# Altium PCB sion.PcbDoc (part 2 of 2)
Units mm, origin at the board's own origin, x right, y up, seen from the top; angles counter-clockwise.
Board outline 144.6 x 80.67 mm, 2 copper layers (Top Layer, Bottom Layer); 226 components, 203 nets, 882 pads, 135 vias.
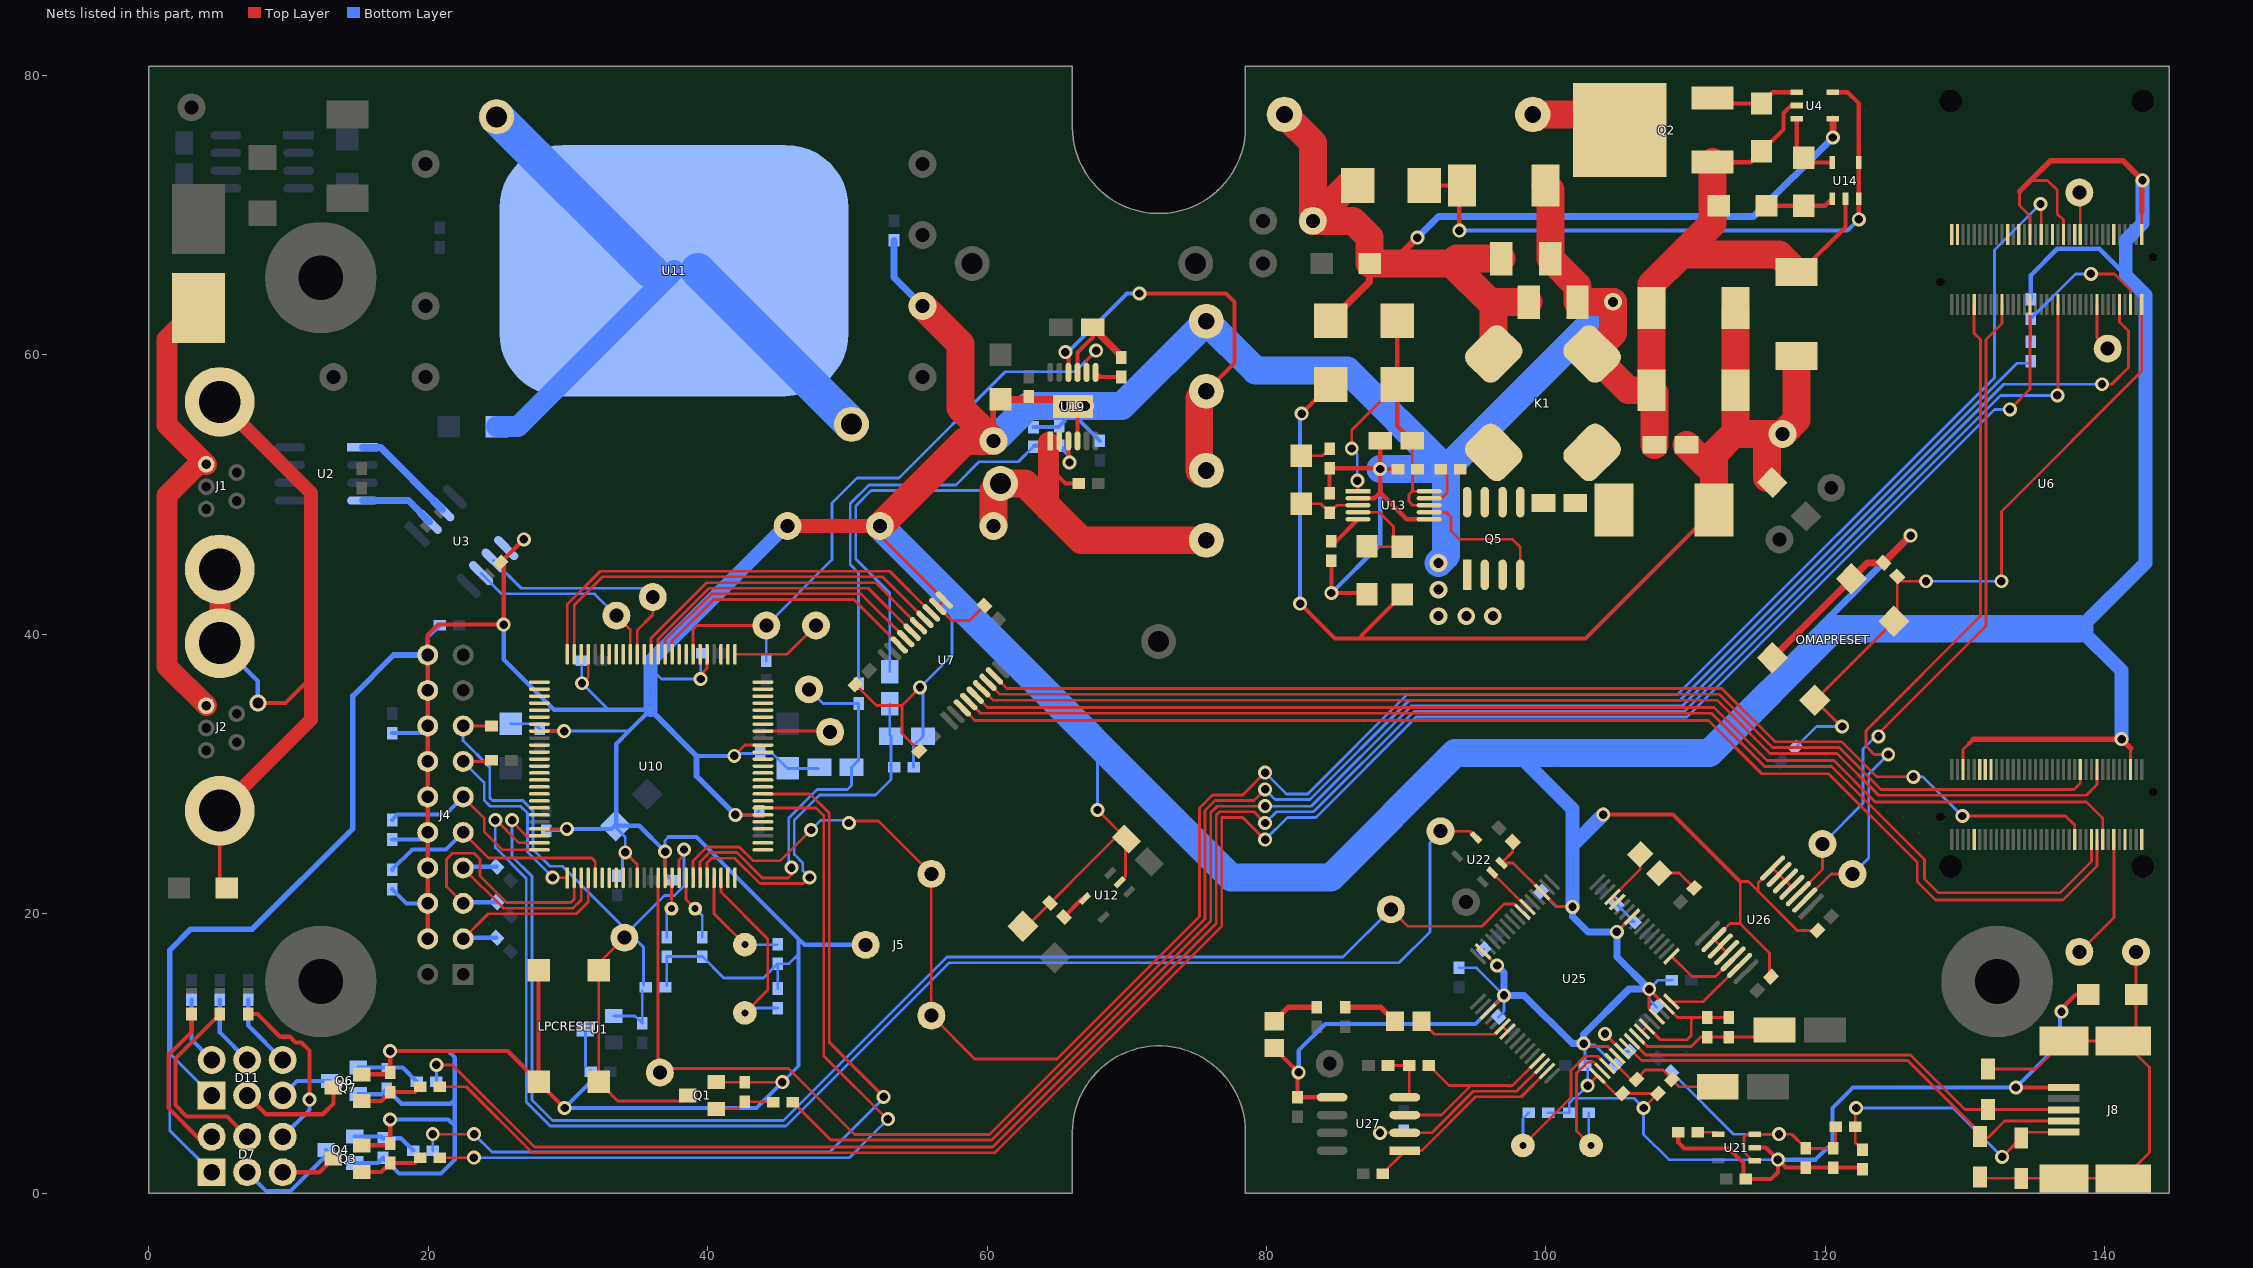
[diagram p2: the nets of this part, all layers, seen from the top]

## Via types
v1: diameter 1, hole 0.6, Top Layer to Bottom Layer, 120 vias
v2: diameter 1.27, hole 0.711, Top Layer to Bottom Layer, 9 vias
v3: diameter 1.2, hole 0.8, Top Layer to Bottom Layer, 6 vias

## Nets (pads, with @x,y where several pads share a name; then routed paths per layer and width w, separated by ;. In a path a pad name is that pad's centre, name@x,y a point inside that pad or via, vN(x,y) a via of type N, cw(c..) or ccw(c..) an arc to the next point about the centre after c; other vN are vias at no path point) (continued)
GND: C1.2 C3.2 C4.2 C6.2 C9.2 C12.1 C13.2 C14.2 C15.2 C16.2 C17.2 C18.2 C19.1 C20.2 C21.2 C22.1 C23.2 C24.1 C25.2 C26.2 C30.2 C32.2 C33.2 C34.2 C35.2 C36.2 C37.2 C38.2 C39.2 C40.1 C42.2 C43.2 C44.2 C45.2 C46.2 C47.2 C56.2 C57.2 C58.2 C59.1 C60.2 C61.2 C62.2 C63.2 C64.2 C65.2 C66.2 C67.2 C68.2 C69.2 C70.2 C71.2 C72.2 C73.2 C74.2 C75.2 C76.1 C77.2 C78.2 C79.2 C80.2 C86.1 C87.2 C88.1 D7.1 D8.K D11.1 GND.0 J4.4 J4.6 J4.8 J4.10 J4.12 J4.14 J4.16 J4.18 J4.20 J5.2 J8.5 K1.4 LPCRESET.3 LPCRESET.4 OMAPRESET.3 OMAPRESET.4 Q1.2 Q2.1 Q3.2 Q4.2 Q5.1 Q5.2 Q5.3 Q6.2 Q7.2 R3.1 R5.1 R16.1 R17.1 R18.1 R19.1 R25.1 R28.2 R34.2 R35.2 R36.1 R41.1 R44.1 R45.2 R46.1 R51.1 R56.1 R57.1 R62.1 R68.1 R69.1 R72.1 U1.3 U3.5 U4.2 U6.J1_50 U6.J1_56 U6.J1_70 U6.J4_3 U6.J4_33 U7.11 U7.12 U10.11 U10.15 U10.31 U10.41 U10.55 U10.72 U10.83 U10.97 U11.5 U12.2 U13.2 U13.6 U14.2 U19.4 U19.13 U21.2 U22.3 U25.1 U25.5 U25.10 U25.11 U25.13 U25.15 U25.25 U25.35 U25.47 U25.51 U26.4 U26.5 U26.6 U26.7 U26.9 U26.10 U26.11 U27.5 | length 1075
  Top Layer w0.2: U10.97@27.952,26.076 v1(29.924,26.076) ; U10.83@27.952,33.076 v1(29.724,33.076) ; v1(31,36.5) 31.452,36.952 U10.72@31.452,38.576 ; v1(34.1,24.4) 34.952,23.548 U10.11@34.952,22.576 ; U10.15@36.952,22.576 v1(36.952,24.448) ; v1(39.5,36.8) 39.5,37.1 39.952,37.552 U10.55@39.952,38.576 ; Q1.2@40.612,7.945 R28.2@42.644,7.945 v1(45.345,7.945) ; v1(41.9,31.3) 42.676,32.076 U10.41@43.952,32.076 ; v1(41.976,27.076) U10.31@43.952,27.076 ; C87.2@50.569,36.412 52.081,34.9 53.9,34.9 ; GND.0@52.324,47.752 52.324,47.061 U7.11@56.93,42.455 U7.12@56.47,41.996 57.466,41 58.749,41 R68.1@59.819,42.069 ; C86.1@55.149,31.652 53.9,32.901 53.9,34.9 ; v1(55.2,36.2) 53.9,34.9 ; C33.2@62.568,19.109 62.855,19.109 69.087,25.341 C32.2@69.985,25.341 v1(67.9,27.427) ; U12.2@69.491,22.243 69.9,22.652 C32.2@69.9,25.256 ; U25.47@95.488,17.312 v1(96.5,16.3) ; U25.51@95.842,12.999 v1(97,14.157) ; C88.1@97.625,25.154 97.625,24.436 U22.3@96.82,23.631 97.654,23.631 U25.35@99.731,21.554 100.785,20.5 v1(101.9,20.5) ; v1(102.7,10.7) 102.9,10.5 104.421,10.5 U25.5@105.105,9.817 ; v1(102.988,7.7) U25.1@103.69,8.402 104.953,7.14 C74.2@105.488,7.14 C73.2@108.028,7.14 v1(106.988,6.1) ; v1(105.079,18.7) U25.25@106.165,19.787 ; U25.10@106.872,11.584 U25.11@107.226,11.938 108.179,10.985 110.085,10.985 110.4,11.3 110.4,12.4 110.573,12.573 ; v1@107.368,14.576 107.368,13.21 U25.13@107.933,12.645 ; v1(107.392,14.6) U25.15@108.64,13.352 109.407,12.585 109.915,12.585 109.927,12.573 110.573,12.573 ; U26.11@112.938,17.229 U26.9@112.019,18.148 113.171,19.3 113.9,19.3 ; C62.2@113.08,12.573 C63.2@111.556,12.573 110.573,12.573 ; C76.1@116,15.598 116,17.2 113.9,19.3 ; U26.4@117.605,21.896 U26.6@116.686,22.815 U26.7@116.226,23.274 115.2,22.248 115.2,21.6 ; C77.2@119.433,18.81 117.99,18.81 115.2,21.6 ; U6.J4_3@129.848,30.318 129.848,31.748 130.3,32.2 ; 133.9,71.7 133.9,70.7 134.648,69.952 U6.J1_50@134.648,68.618 ; 134.693,72.493 135.907,72.493 136.6,71.8 136.6,70.1 137.048,69.652 U6.J1_56@137.048,68.618 ; U6.J4_33@141.848,30.318 141.848,31.852 ; U6.J1_70@142.648,68.618 142.648,70.248 ; 113.9,19.3 113.9,22.3 114.5,22.3 115.2,21.6
  Top Layer w0.3: Q3.2@15.24,3.429 R41.1@17.145,3.429 ; Q7.2@15.24,8.509 17.145,8.509 R72.1@17.272,8.636 v1(17.272,10.172) 25.687,10.172 LPCRESET.4@27.895,7.964 ; R41.1@17.272,3.556 v1(17.272,5.272) ; J4.4@19.956,18.204 J4.6@19.956,20.744 J4.8@19.956,23.284 J4.10@19.956,25.824 J4.12@19.956,28.364 J4.14@19.956,30.904 J4.16@19.956,33.444 J4.18@19.956,35.984 J4.20@19.956,38.524 19.956,39.956 20.7,40.7 v1(25.4,40.7) 25.4,44.915 C3.2@25.175,45.139 v1(26.836,46.8) ; LPCRESET.3@27.895,15.964 LPCRESET.4@27.895,7.964 ; v1(29.759,6.1) LPCRESET.4@27.895,7.964 ; U19.4@66.466,53.848 U19.13@66.466,55.973 ; D8.K@80.548,10.404 v1(82.3,8.652) ; v1@82.212,8.564 C78.2@82.212,6.861 U27.5@84.692,6.861 ; C44.2@84.512,50.113 C45.2@84.512,51.891 v1@88.085,51.891 ; R56.1@84.644,45.26 v1(84.644,42.956) 87.104,42.956 R57.1@87.184,42.876 ; U13.2@86.544,49.74 87.74,49.74 88.138,50.138 ; C6.2@88.138,53.848 v1(88.138,51.838) ; C40.1@89.408,51.816 89.386,51.838 v1(88.138,51.838) ; U13.6@91.644,48.24 90.036,48.24 88.138,50.138 ; v1(104.1,27.1) 109.1,27.1 113.9,22.3 ; C72.2@109.475,4.356 109.475,3.625 109.9,3.2 113.1,3.2 114.132,2.168 C71.2@114.132,1.177 ; Q2.1@111.918,73.796 114.652,73.796 R3.1@115.428,74.572 117,76.144 117,77.3 117.551,77.851 U4.2@117.944,77.851 ; C71.2@114.293,1.016 116.116,1.016 116.6,1.5 v1(116.6,2.4) ; U21.2@115.335,3.265 U21.2@114.932,3.265 115.735,3.265 v1(116.6,2.4) ; C4.2@117.94,65.932 118.232,65.932 121.437,69.137 U14.2@121.437,71.184 ; 117.969,1.831 C61.2@118.588,1.831 ; C59.1@122.652,1.704 122.525,1.831 C61.2@118.588,1.831 ; 130.3,32.2 130.6,32.5 ; v1(133.636,7.564) J8.5@137.068,7.564 ; v1(136.9,13) 136.9,13.2 137.924,14.224 ; 88.138,50.138 v1(88.138,51.838) ; v1(116.6,2.4) 117.169,1.831 C61.2@118.588,1.831
  Top Layer w0.4: GND.0@60.452,53.848 C57.2@60.452,56.312 ; 130.6,32.5 v1(141.2,32.5) 141.848,31.852 ; 133.9,71.7 134.693,72.493 136.1,73.9 141.3,73.9 142.648,72.552 142.648,70.248
  Top Layer w0.5: C57.2@60.96,56.82 65.619,56.82 U19.13@66.141,56.298 ; OMAPRESET.4@116.212,38.319 OMAPRESET.3@121.869,43.976 123.017,45.124 C9.2@124.16,45.124 v1(126.1,47.064)
  Top Layer w1: GND.0@45.72,47.752 GND.0@52.324,47.752
  Top Layer w2: GND.0@52.324,47.752 58.42,53.848 GND.0@60.452,53.848 58.1,56.2 58.1,60.772 U11.5@55.372,63.5 ; C46.2@99.98,72.136 100.31,71.806 C42.2@100.31,66.895 102.258,64.947 C43.2@102.258,63.787 v2@104.787,63.787 ; v2(104.8,63.8) 104.8,61.565 K1.4@103.303,60.068 105.899,57.472 C38.2@107.56,57.472 ; C37.2@107.77,53.564 107.77,57.262 C38.2@107.56,57.472 ; Q2.1@111.918,73.796 111.918,69.418 109.7,67.2 ; C4.2@117.94,65.932 116.672,67.2 109.7,67.2 ; C38.2@107.56,57.472 C39.2@107.56,63.372 107.56,65.06 109.7,67.2
  Bottom Layer w0.2: D7.1@4.5,1.5 1.5,4.5 1.5,10 D11.1@4.5,7 ; C14.2@25.908,33.604 27.609,33.604 C13.2@27.972,33.241 28.137,33.076 v1(29.724,33.076) 34.376,33.076 ; C12.1@28.44,25.952 29.8,25.952 v1(29.924,26.076) ; v1@30.988,36.512 C19.1@30.988,38.1 ; v1(31,36.5) 32.9,34.6 ; C1.2@31.248,9.071 U1.3@31.248,11.715 ; C25.2@33.452,26.416 33.452,26.301 33.452,26.156 34.1,25.508 v1(34.1,24.4) 33.901,24.201 C26.2@33.901,22.396 ; 35.9,37.6 36.7,36.8 v1(39.5,36.8) C24.1@39.5,38.536 ; C47.2@37.076,14.851 C15.2@37.076,16.935 C16.2@39.616,16.935 41.151,15.4 43.987,15.4 C17.2@45.014,16.427 ; 37.2,25.5 36.952,25.252 36.952,22.901 C23.2@37.457,22.396 ; v1(41.9,31.3) 42.08,31.48 C22.1@43.76,31.48 44.644,31.48 C21.2@45.72,30.404 C35.2@47.93,30.404 ; v1(41.976,27.076) 43.407,27.076 C18.2@43.68,27.349 ; C20.2@45.014,14.649 C17.2@45.014,16.427 ; v1(45.345,7.945) 46.52,9.12 ; 46.5,17.1 45.827,16.427 C17.2@45.014,16.427 ; C36.2@54.737,30.48 54.737,32.033 R25.1@55.404,32.7 v1@55.404,35.996 ; v1(55.2,36.2) 57.488,38.488 57.488,42.588 ; v1(67.9,27.427) 67.9,31.7 ; C75.2@93.776,16.129 95.028,16.129 v1(97,14.157) 97,13.016 C70.2@96.598,12.614 ; C69.2@95.52,17.463 95.52,17.28 v1(96.5,16.3) ; C65.2@99.651,21.594 100.745,20.5 v1(101.9,20.5) ; C80.2@100.157,5.753 C79.2@101.673,5.753 101.673,6.473 102,6.8 102.088,6.8 ; v1(102.7,10.7) 102.793,10.607 C66.2@102.793,9.144 ; v1@102.8,10.6 103.496,10.6 R46.1@104.952,9.144 ; C66.2@102.988,8.949 v1(102.988,7.7) 102.088,6.8 ; C68.2@105.039,20.696 C67.2@106.297,19.439 105.817,19.439 v1(105.079,18.7) ; C64.2@107.913,13.332 107.392,13.853 v1(107.392,14.6) 108.032,15.24 R51.1@109.016,15.24 ; v1(116.6,2.4) 108.8,2.4 106.988,4.212 v1(106.988,6.1) 106.288,6.8 102.088,6.8
  Bottom Layer w0.3: Q4.2@14.732,2.159 16.383,2.159 R44.1@16.764,2.54 17.904,1.4 20.9,1.4 21.9,2.4 21.9,4.8 ; Q6.2@14.996,7.083 16.647,7.083 R69.1@17.028,7.464 18.092,6.4 21.6,6.4 21.9,6.7 ; v1(17.272,5.272) 21.428,5.272 21.9,4.8 ; v1(17.272,10.172) 21.428,10.172 21.9,9.7 21.9,6.7 ; R16.1@17.416,21.76 18.432,20.744 J4.6@19.956,20.744 ; R17.1@17.416,25.316 19.448,25.316 J4.10@19.956,25.824 ; R18.1@17.416,32.936 19.448,32.936 J4.16@19.956,33.444 ; J4.20@19.956,38.524 19.956,39.768 R19.1@20.828,40.64 ; v1(25.4,40.7) 25.4,38.2 29,34.6 32.9,34.6 35.9,34.6 34.376,33.076 33.452,32.152 33.452,26.416 33.112,26.076 v1(29.924,26.076) ; 26.211,46.174 v1(26.836,46.8) ; C1.2@31.619,8.7 31.619,7.96 v1(29.759,6.1) 43.5,6.1 v1(45.345,7.945) ; C25.2@33.413,26.301 33.452,26.301 35.099,26.301 v1(36.952,24.448) ; 37.2,25.5 39.2,25.5 46.5,18.2 ; 39.2,31.3 v1(41.9,31.3) ; 46.5,9.14 46.5,17.1 46.5,18.2 ; J5.2@51.308,17.78 46.92,17.78 46.5,18.2 ; R35.2@63.316,54.833 65.108,54.833 65.516,55.241 v2(65.516,56.348) ; v2@65.572,56.348 R36.1@68.072,53.848 ; v1(82.3,8.652) 82.3,10.2 84.2,12.1 94.943,12.1 v1(97,14.157) ; v1(84.644,42.956) 88.138,46.45 v1(88.138,51.838) ; v1(116.6,2.4) 119.3,2.4 120.5,3.6 120.5,6.1 121.964,7.564 v1(133.636,7.564) 136.8,10.728 136.8,12.9 v1(136.9,13) ; R5.1@134.698,63.985 134.698,65.698 136.6,67.6 139.6,67.6 141.5,65.7 ; 21.9,4.8 21.9,6.7
  Bottom Layer w0.4: 1.5,10 1.5,17.4 3,18.9 7.4,18.9 14.6,26.1 14.6,35.6 17.524,38.524 J4.20@19.956,38.524 ; 35.9,34.6 39.2,31.3 39.2,29.852 v1(41.976,27.076)
  Bottom Layer w0.5: C30.2@53.34,68.199 53.34,65.532 U11.5@55.372,63.5 ; v1(96.5,16.3) 97,15.8 v1(97,14.157) 98.443,14.157 101.9,10.7 v1(102.7,10.7) 102.7,11.373 105.927,14.6 v1(107.392,14.6) 105.079,16.914 v1(105.079,18.7) 103,18.7 101.9,19.8 v1(101.9,20.5) ; 118.75,39.714 v1(126.1,47.064)
  Bottom Layer w1: 35.9,34.6 35.9,37.6 35.9,38.104 GND.0@45.634,47.838 ; 98.1,31.3 101.9,27.5 101.9,24.9 ; v1(101.9,20.5) 101.9,24.9 ; v1(104.1,27.1) 101.9,24.9 ; v1(141.2,32.5) 141.2,37.4 138.2,40.4 142.9,45.1 142.9,64.3 141.5,65.7 141.5,68.2 142.7,69.4 v1(142.7,72.5)
  Bottom Layer w2: GND.0@52.324,47.752 57.488,42.588 77.476,22.6 84.6,22.6 93.5,31.5 111.7,31.5 120.6,40.4 138.2,40.4 ; GND.0@60.452,53.848 62.952,56.348 v2(65.516,56.348) 65.572,56.348 v2(67.016,56.348) 69.636,56.348 C58.2@75.692,62.404 79.196,58.9 85.776,58.9 92.838,51.838 ; v1(88.138,51.838) 92.838,51.838 ; v2(92.3,45.1) 92.838,45.638 92.838,51.838 ; v2(104.8,63.8) 92.838,51.838
  other v2: 92.3,41.3 94.3,41.3 96.2,41.3 92.3,43.2
L\P\C\R\E\S\E\T\: R6.2 U6.J1_5 | length 129
  Top Layer w0.2: R6.2@46.089,6.516 48.805,3.8 60.334,3.8 76,19.466 76,26.9 76,27.231 76.469,27.7 v1(79.9,27.7) ; v1(139.8,57.9) 140.5,57.9 141.7,59.1 141.7,61.716 141.048,62.368 U6.J1_5@141.048,63.618
  Bottom Layer w0.2: v1(79.9,27.7) 83.2,27.7 90.384,34.884 109.753,34.884 132.769,57.9 v1(139.8,57.9)
LEDRED: R61.1 U6.J1_16 | length 153.7
  Top Layer w0.2: v1(20.584,9.184) 21.716,9.184 27.6,3.3 60.4,3.3 76.4,19.3 76.4,27.066 76.634,27.3 79.1,27.3 v1(79.9,26.5) ; U6.J1_16@136.6,63.57 U6.J1_16@136.648,63.618 v1@136.648,57.148
  Bottom Layer w0.2: R61.1@20.584,7.972 v1(20.584,9.184) ; v1(79.9,26.5) 80.7,27.3 83.366,27.3 90.55,34.484 109.919,34.484 132.534,57.1 v1(136.6,57.1)
LEDYLW: R71.1 U6.J1_21 | length 150.4
  Top Layer w0.2: R71.1@20.828,7.62 22.714,7.62 27.434,2.9 60.566,2.9 76.8,19.134 76.8,26.9 78.3,26.9 v1(79.9,25.3) ; v1(133.2,56.1) 134.648,57.548 U6.J1_21@134.648,63.618
  Bottom Layer w0.2: v1(79.9,25.3) 81.5,26.9 83.531,26.9 90.716,34.084 110.084,34.084 132.1,56.1 v1(133.2,56.1)
LPC_CLK: U7.16 U10.62 | length 22.1
  Top Layer w0.2: U10.62@36.452,38.576 36.452,39.651 40.101,43.3 51.489,43.3 U7.16@54.632,40.157
LPC_CS: U7.15 U10.63 | length 23.2
  Top Layer w0.2: U10.63@35.952,38.576 35.952,39.717 39.935,43.7 52.008,43.7 U7.15@55.091,40.617
LPC_MISO: U7.17 U10.61 | length 20.9
  Top Layer w0.2: U10.61@36.952,38.576 36.952,39.585 40.266,42.9 42.334,42.9 50.97,42.9 U7.17@54.172,39.698
LPC_MOSI: U7.18 U10.60 | length 19.8
  Top Layer w0.2: U10.60@37.452,38.576 37.452,39.52 40.432,42.5 50.45,42.5 U7.18@53.712,39.238
LPC_RX: U7.14 U10.74 | length 30.7
  Top Layer w0.2: U10.74@30.452,38.576 30.452,42.1 32.472,44.12 52.507,44.12 U7.14@55.551,41.077
LPC_TX: U7.13 U10.75 | length 31.9
  Top Layer w0.2: U10.75@29.952,38.576 29.952,42.166 32.306,44.52 53.027,44.52 U7.13@56.01,41.536
NetC4_1: 3V3_ISNS.0 C4.1 C37.1 C38.1 C39.1 D1.K D6.A R27.2 R30.2 | length 84.2
  Top Layer w0.3: v1(82.4,42.2) 84.9,39.7 102.829,39.7 D1.K@112.021,48.892 ; v1(82.511,55.8) D6.A@84.583,57.872 ; 86.8,39.923 R30.2@89.724,42.847
  Top Layer w2: C37.1@110.056,53.564 111.72,51.9 ; D1.K@112.021,48.892 112.021,52.921 113.444,54.344 ; C39.1@113.56,63.372 C38.1@113.56,57.472 113.56,54.46 113.444,54.344 ; R27.2@115.824,51.181 115.824,53.244 ; C4.1@117.94,59.932 117.94,55.36 3V3_ISNS.0@116.924,54.344 113.444,54.344
  Bottom Layer w0.3: v1(82.4,42.2) 82.4,55.689 v1(82.511,55.8)
NetC6_1: C6.1 C40.2 D2.K D6.K U13.1 U13.8 U13.10 | length 25.4
  Top Layer w0.2: v1(86.1,53.3) 86.1,54.619 D6.K@89.353,57.872 ; v1(86.5,51) 86.544,50.956 U13.1@86.544,50.24 ; C6.1@90.424,53.848 90.424,52.197 90.44,52.181 90.44,50.24 ; U13.8@91.644,49.24 90.46,49.24 90.2,49.5 90.2,50 90.44,50.24 ; U13.10@91.644,50.24 90.44,50.24
  Top Layer w0.3: D2.K@89.353,62.444 D6.K@89.353,57.872 89.353,54.919 C6.1@90.424,53.848
  Bottom Layer w0.2: v1(86.1,53.3) 86.5,52.9 v1(86.5,51)
NetC34_1: C34.1 U12.4 | length 2.2
  Top Layer w0.3: C34.1@65.668,19.774 C34.1@65.495,19.774 66.811,21.089 U12.4@66.983,21.089
NetC35_1: C35.1 LTC_ISENSE.0 R22.1 U10.20 | length 28.5
  Top Layer w0.2: U10.20@39.452,22.576 39.452,23.718 40.11,24.376 42.09,24.376 43.906,22.56 45.76,22.56 46,22.8 v1(46,23.3)
  Bottom Layer w0.2: v1(46,23.3) 45.8,23.5 45.8,26.866 47.834,28.9 50,28.9 50.292,29.192 C35.1@50.292,30.48 50.8,30.988 R22.1@50.8,35.052 48.26,35.052 LTC_ISENSE.0@47.244,36.068
NetC36_1: C36.1 R24.2 R25.2 U10.21 | length 27.5
  Top Layer w0.2: U10.21@39.952,22.576 39.952,23.652 40.276,23.976 41.313,23.976 41.924,23.976 43.74,22.16 46.86,22.16 v1(47.3,22.6)
  Bottom Layer w0.2: v1(47.3,22.6) 46.8,23.1 46.8,23.631 46.2,24.231 46.2,26.7 48,28.5 52,28.5 53.118,29.618 R25.2@53.118,32.7 ; R25.2@53.028,32.79 R24.2@53.028,35.034
NetC41_1: C41.1 K1.2 Q5.5 Q5.6 Q5.7 Q5.8 R29.2
NetC41_2: C41.2 D1.A K1.3
NetC44_1: C44.1 R31.2 U13.3 | length 4.5
  Top Layer w0.2: R31.2@82.48,49.351 83.877,49.351 C44.1@84.512,48.716 85.036,49.24 U13.3@86.544,49.24
NetC45_1: C45.1 R31.1 | length 2.2
  Top Layer w0.2: R31.1@82.48,52.78 84.004,52.78 C45.1@84.512,53.288
NetC46_1: C46.1 D9.K U4.5 U14.3 U14.4 | length 45.4
  Top Layer w0.3: D9.K@91.285,72.136 C46.1@93.98,72.136 93.8,71.956 v1(93.8,68.9) ; U4.5@120.534,78.804 121.596,78.804 122.394,78.006 U14.4@122.394,73.774 U14.3@122.394,71.184 v1(122.394,69.706)
  Bottom Layer w0.3: v1(93.8,68.9) 121.588,68.9 v1(122.394,69.706)
NetC59_2: C59.2 J8.1 L1.1 U20.1 | length 20.3
  Top Layer w0.2: v1(122.2,6.1) 122.144,6.044 L1.1@122.144,4.752 122.144,3.609 C59.2@122.652,3.101 ; v1(132.656,2.6) U20.1@134.02,3.964 134.42,4.364 J8.1@137.068,4.364
  Bottom Layer w0.2: v1(122.2,6.1) 129.156,6.1 v1(132.656,2.6)
NetC62_1: C62.1 C63.1 L2.2 U25.9 | length 9.9
  Top Layer w0.2: U25.9@106.519,11.231 107.25,10.5 110.4,10.5 111.076,11.176 C63.1@111.556,11.176 C62.1@113.08,11.176 L2.2@115.852,11.176
NetC72_1: C72.1 U21.4 | length 1.5
  Top Layer w0.2: C72.1@110.872,4.356 112.208,4.356 U21.4@112.342,4.222
NetC73_1: C73.1 C74.1 L3.2 U25.4 | length 8.9
  Top Layer w0.2: U25.4@104.751,9.463 106.086,8.128 C74.1@106.476,8.128 107.111,8.828 108.381,8.828 C73.1@109.016,8.128 109.524,7.62 L3.2@112.296,7.62
NetC79_1: C79.1 U25.2 Y4.2 | length 10.5
  Top Layer w0.2: Y4.2@103.229,3.42 102.188,4.46 102.188,8.588 103,9.4 103.4,9.4 U25.2@104.044,8.756
  Bottom Layer w0.2: C79.1@103.07,5.753 103.07,3.578 Y4.2@103.229,3.42
NetC80_1: C80.1 U25.3 Y4.1 | length 12.6
  Top Layer w0.2: Y4.1@98.349,3.42 101.788,6.86 101.788,8.788 102.8,9.8 103.707,9.8 U25.3@104.398,9.109
  Bottom Layer w0.2: Y4.1@98.349,3.42 98.349,5.342 C80.1@98.76,5.753
NetD7_2: D7.2 Q4.3 | length 7.7
  Bottom Layer w0.3: D7.2@7.04,1.5 8.39,0.15 10.139,0.15 12.7,2.711 Q4.3@12.7,3.099
NetD7_3: D7.3 Q3.3 | length 4
  Top Layer w0.3: D7.3@9.58,1.5 12.219,1.5 Q3.3@13.208,2.489
NetD7_4: D7.4 R38.2 | length 12.4
  Top Layer w0.3: R38.2@7.112,12.827 7.773,12.827 9.4,11.2 10.098,11.2 10.503,10.795 10.905,10.795 11.5,10.2 v1(11.5,6.7)
  Bottom Layer w0.3: D7.4@9.58,4.04 11.5,5.96 v1(11.5,6.7)
NetD7_5: D7.5 R40.2 | length 13.9
  Top Layer w0.3: R40.2@5.08,12.827 1.9,9.647 1.9,6.307 2.707,5.5 5.58,5.5 D7.5@7.04,4.04
NetD7_6: D7.6 R42.2 | length 11.5
  Top Layer w0.3: R42.2@3.048,12.827 3.048,11.548 1.4,9.9 1.4,6.1 3.6,3.9 4.36,3.9 D7.6@4.5,4.04
NetD8_A: D8.A R53.1 | length 3.5
  Top Layer w0.4: D8.A@80.548,12.304 81.564,13.32 R53.1@83.596,13.32
NetD10_A: D10.A R55.1 | length 4
  Top Layer w0.4: R55.1@85.628,13.32 88.168,13.32 D10.A@89.184,12.304
NetD11_2: D11.2 Q7.3 | length 8.2
  Top Layer w0.3: D11.2@7.04,7 8.39,5.65 12.45,5.65 13.208,6.408 Q7.3@13.208,7.569
NetD11_3: D11.3 Q6.3 | length 3.8
  Bottom Layer w0.3: D11.3@9.58,7 10.603,8.023 Q6.3@12.964,8.023
NetD11_4: D11.4 R60.2 | length 5.3
  Bottom Layer w0.3: R60.2@7.112,13.843 7.112,12.008 D11.4@9.58,9.54
NetD11_5: D11.5 R64.2 | length 5.1
  Bottom Layer w0.3: R64.2@5.08,13.843 5.08,11.5 D11.5@7.04,9.54
NetD11_6: D11.6 R70.2 | length 4.9
  Bottom Layer w0.3: R70.2@3.048,13.843 3.048,10.992 D11.6@4.5,9.54
NetD13_A: D13.A R54.1 | length 3
  Top Layer w0.2: D13.A@108.099,22.915 109.536,22.915 R54.1@110.613,21.837
NetF1_1: F1.1 J1.2 J2.2 | length 33.2
  Top Layer w1.5: F1.1@3.556,63.363 1.3,61.107 1.3,54.98 J1.2@4.112,52.168 3.52,52.168 1.3,49.948 1.3,37.708 J2.2@4.112,34.896
NetJ1_0: J1.0 J2.0 R7.1 | length 55.6
  Top Layer w0.254: J2.0@5.077,27.378 5.077,22.355 R7.1@5.588,21.844
  Top Layer w0.3: v3(7.819,35.081) 9.781,35.081 11.6,36.9
  Top Layer w1: J2.0@5.077,27.378 11.6,33.901 11.6,36.9 11.6,50.115 J1.0@5.077,56.639
  Top Layer w1.5: J2.0@5.077,39.367 J1.0@5.077,44.65
  Bottom Layer w0.3: J2.0@5.077,39.367 7.8,36.643 7.8,35.1 v3(7.819,35.081)
NetJ8_2: J8.2@137.068,5.164 U24.0 U25.7 | length 34.2
  Top Layer w0.2: U25.7@105.812,10.524 106.835,9.5 125.9,9.5 U24.0@131.3,4.1 ; U24.0@131.47,3.964 131.628,3.964 132.828,5.164 J8.2@137.068,5.164
NetJ8_3: J8.3 U23.0 U25.8 | length 32.8
  Top Layer w0.2: U25.8@106.165,10.877 107.143,9.9 117.2,9.9 ; 117.3,9.9 126.1,9.9 130.004,5.996 U23.0@131.628,5.996 137.036,5.996 J8.3@137.068,5.964
NetQ1_1: Q1.1 R6.1 R28.1 | length 4.3
  Top Layer w0.2: Q1.1@40.612,6.04 42.136,6.04 R28.1@42.644,6.548 R6.1@44.66,6.548
NetQ2_2: Q2.2 R1.1 | length 5.1
  Top Layer w2: R1.1@99.06,77.216 Q2.2@104.148,77.216
NetQ2_3: Q2.3 R3.2 U4.1 | length 6.5
  Top Layer w0.3: Q2.3@111.918,78.396 112.313,78.001 R3.2@115.428,78.001 116.231,78.804 U4.1@117.944,78.804
NetQ3_1: Q3.1 R39.2 R41.2 | length 4.6
  Top Layer w0.3: Q3.1@15.24,1.524 16.637,1.524 R41.2@17.272,2.159 19.05,2.159 R39.2@19.431,2.54
NetQ4_1: Q4.1 R43.2 R44.2 | length 4.4
  Bottom Layer w0.3: Q4.1@14.732,4.064 R44.2@16.637,4.064 ; R44.2@16.764,3.937 18.034,3.937 R43.2@18.923,3.048
NetQ5_4: Q5.4 U13.7 | length 10.1
  Top Layer w0.2: U13.7@91.644,48.74 92.86,48.74 93.2,48.4 93.2,47.4 93.8,46.8 97.6,46.8 98.165,46.235 Q5.4@98.165,44.26
NetQ6_1: Q6.1 R61.2 R69.2 | length 4.6
  Bottom Layer w0.3: Q6.1@14.996,8.988 18.171,8.988 R61.2@19.187,7.972
NetQ7_1: Q7.1 R71.2 R72.2 | length 4.6
  Top Layer w0.3: Q7.1@15.24,6.604 16.637,6.604 R72.2@17.272,7.239 19.05,7.239 R71.2@19.431,7.62
NetR4_2: R4.2 RSTOUT.0 U10.14 | length 142.1
  Top Layer w0.2: RSTOUT.0@36.452,8.636 U10.14@36.452,22.576 ; RSTOUT.0@36.576,8.636 36.857,8.917 45.783,8.917 50.5,4.2 60.169,4.2 75.6,19.631 75.6,26.9 75.6,27.397 76.303,28.1 79.1,28.1 v1(79.9,28.9)
  Bottom Layer w0.2: v1(79.9,28.9) 80.617,28.183 83.117,28.183 90.219,35.284 109.587,35.284 133.703,59.4 R4.2@134.648,59.4
NetR20_1: R20.1 U11.8 | length 17.3
  Bottom Layer w1.5: R20.1@24.892,54.864 26.416,54.864 U11.8@37.592,66.04
NetR29_1: R29.1 U13.9 | length 3.3
  Top Layer w0.2: U13.9@91.644,49.74 92.53,49.74 92.94,50.15 92.94,51.332 R29.1@92.456,51.816
NetR30_1: R30.1 R57.2 U13.4 | length 7
  Top Layer w0.2: U13.4@86.544,48.74 88.06,48.74 89.084,47.716 R30.1@89.084,46.205 ; R57.2@87.184,46.305 87.213,46.276 R30.1@89.724,46.276
NetR33_1: R33.1 R37.2 U19.9 | length 6.7
  Top Layer w0.3: U19.9@66.466,58.748 66.466,60.168 67.448,61.15 67.45,61.15 67.564,61.264 R33.1@67.564,61.976
  Top Layer w0.5: R33.1@67.564,61.976 69.596,59.944 R37.2@69.596,59.817
NetR37_1: R37.1 U19.7 | length 2
  Top Layer w0.3: U19.7@67.766,58.748 68.094,58.42 R37.1@69.596,58.42
NetR39_1: R39.1 U10.32 | length 61.4
  Top Layer w0.2: R39.1@20.828,2.54 v1(23.26,2.54) ; U10.32@43.952,27.576 47.758,27.576 48.3,27.034 48.3,9.834 v1@52.867,5.267
  Bottom Layer w0.2: v1(23.26,2.54) 28.76,2.54 50.14,2.54 51.8,4.2 v1(52.9,5.3)
NetR43_1: R43.1 U10.34 | length 62.9
  Top Layer w0.2: v1(20.32,4.22) v1(23.28,4.22) ; U10.34@43.952,28.576 47.324,28.576 48.7,27.2 48.7,10.8 v1(52.6,6.9)
  Bottom Layer w0.2: R43.1@20.32,3.048 v1(20.32,4.22) ; v1(23.28,4.22) 24.56,2.94 28.926,2.94 48.74,2.94 52.6,6.8 v1(52.6,6.9)
NetR46_2: R46.2 U25.6 | length 4
  Top Layer w0.2: v1(104.228,11.4) U25.6@105.458,10.17
  Bottom Layer w0.2: v1(104.228,11.4) 105.496,10.132 R46.2@105.94,10.132
NetR48_1: R48.1 R52.1 U27.4 | length 3.5
  Top Layer w0.2: R48.1@88.696,9.144 R52.1@90.22,9.144 90.22,7.189
NetR49_1: R49.1 U25.63 U27.1 | length 14.9
  Top Layer w0.2: R49.1@88.308,1.4 89.892,2.984 U27.1@89.892,3.051 91.117,3.051 94.966,6.9 98.228,6.9 U25.63@100.084,8.756
NetR50_1: R50.1 U25.62 U27.2 | length 15.2
  Top Layer w0.2: v1(88.121,4.321) U27.2@89.892,4.321 91.821,4.321 94.8,7.3 97.9,7.3 99.709,9.109 U25.62@99.731,9.109
  Bottom Layer w0.2: v1(88.121,4.321) R50.1@89.697,4.321
NetR52_2: R52.2 U25.61 U27.3 | length 14.7
  Top Layer w0.2: U27.3@89.892,5.591 92.525,5.591 94.634,7.7 ; R52.2@91.617,9.144 93.061,7.7 94.634,7.7 ; U25.61@99.377,9.463 97.614,7.7 94.634,7.7
NetR56_2: R56.2 U13.5 | length 2.2
  Top Layer w0.3: R56.2@84.961,46.657 U13.5@86.544,48.24
NetR59_1: R59.1 R62.2 U14.1 | length 4.9
  Top Layer w0.3: R62.2@115.785,70.676 R59.1@118.452,70.676 119.976,70.676 U14.1@120.484,71.184
NetR59_2: R59.2 U4.3 U14.5 | length 5.2
  Top Layer w0.3: U4.3@117.944,76.894 117.944,74.613 118.783,73.774 U14.5@120.484,73.774
NetTP3_0: CAN_RX.0 U3.7 U10.66 | length 14.1
  Top Layer w0.2: CAN_RX.0@33.464,41.34 34.452,40.352 U10.66@34.452,38.576
  Bottom Layer w0.2: U3.7@23.781,44.378 25.259,42.9 31.904,42.9 CAN_RX.0@33.464,41.34
NetTP4_0: CAN_TX.0 U3.6 U10.65 | length 17
  Top Layer w0.2: U10.65@34.952,38.576 34.952,40.288 36.068,41.404 CAN_TX.0@36.068,42.672
  Bottom Layer w0.2: U3.6@24.679,45.276 26.655,43.3 35.44,43.3 CAN_TX.0@36.068,42.672
NetTP16_0: SYS_EN.0 U6.J1_59 | length 2.9
  Top Layer w0.2: U6.J1_59@138.248,68.618 SYS_EN.0@138.248,71.556
NetTP17_0: GPIO0_WKUP.0 U6.J1_9 | length 3.5
  Top Layer w0.2: U6.J1_9@139.448,63.618 139.448,61.212 GPIO0_WKUP.0@140.208,60.452
NetTP19_0: U10.99 U22.4 UART1_TX.0 | length 106.4
  Top Layer w0.2: v1(24.8,26.7) 24.869,26.7 26.493,25.076 U10.99@27.952,25.076 ; UART1_TX.0@92.456,25.908 94.544,25.908 U22.4@94.989,25.463
  Bottom Layer w0.2: v1(24.8,26.7) 24.8,24.734 27.017,22.517 27.017,6.517 28.734,4.8 45.6,4.8 57.3,16.5 89.5,16.5 91.7,18.7 91.7,25.1 UART1_TX.0@92.456,25.856 ; UART1_TX.0@92.4,25.8 UART1_TX.0@92.456,25.856 ; UART1_TX.0@92.456,25.908 UART1_TX.0@92.456,25.856
NetTP20_0: U6.J1_26 U26.3 UART_RX.0 | length 48.3
  Top Layer w0.2: U26.3@118.064,21.436 119.788,23.159 UART_RX.0@119.788,25.001 ; v1(123.8,32.7) 123.8,32.9 131.5,40.6 131.5,61.1 132.648,62.248 U6.J1_26@132.648,63.618
  Bottom Layer w0.2: UART_RX.0@119.788,25.001 122.7,27.913 122.7,31.8 123.6,32.7 v1(123.8,32.7)
NetTP22_0: U6.J1_31 U26.2 UART_TX.0 | length 50.9
  Top Layer w0.2: U26.2@118.524,20.976 120.394,22.846 UART_TX.0@121.943,22.846 ; v1(124.5,31.4) 123.5,31.4 122.9,32 122.9,33.1 131.1,41.3 131.1,61.1 130.648,61.552 U6.J1_31@130.648,63.618
  Bottom Layer w0.2: UART_TX.0@121.943,22.846 123.1,24.003 123.1,30 v1(124.5,31.4)
NetTP28_0: CLKOUT.0 U10.43 | length 4.8
  Top Layer w0.2: U10.43@43.952,33.076 CLKOUT.0@48.712,33.076
NetTP29_0: SPI1_NIRQ.0@47.752,40.64 U10.51 | length 6.7
  Top Layer w0.2: U10.51@41.952,38.576 45.688,38.576 SPI1_NIRQ.0@47.752,40.64
NetTP30_0: SPI1_NIRQ.0@138.176,17.272 U6.J4_41 | length 9.1
  Top Layer w0.2: SPI1_NIRQ.0@138.176,17.272 140.648,19.744 U6.J4_41@140.648,25.318
NetU2_1: U2.1 U3.3 | length 7.5
  Bottom Layer w0.5: U2.1@15.292,53.389 16.566,53.389 U3.3@21.002,48.953
NetU2_4: U2.4 U3.2 | length 5.4
  Bottom Layer w0.5: U2.4@15.292,49.579 18.58,49.579 U3.2@20.104,48.055
NetU6_J1_48: U6.J1_48
NetU6_J1_58: U6.J1_58
NetU6_J4_6: U6.J4_6
NetU6_J4_7: U6.J4_7
NetU6_J4_8: U6.J4_8
NetU6_J4_24: U6.J4_24 U7.7 | length 82.5
  Top Layer w0.2: U7.7@60.062,36.565 60.92,35.708 112.412,35.708 116.22,31.9 120.993,31.9 123.993,28.9 137.8,28.9 138.248,29.348 U6.J4_24@138.248,30.318
NetU6_J4_27: U6.J4_27 U7.6 | length 84.4
  Top Layer w0.2: U7.6@59.603,36.106 60.42,35.288 112.239,35.288 116.046,31.481 120.819,31.481 123.819,28.481 138.681,28.481 139.448,29.248 U6.J4_27@139.448,30.318
NetU6_J4_43: U6.J4_43 U7.5 | length 85.9
  Top Layer w0.2: U7.5@59.143,35.646 60.02,34.769 112.024,34.769 115.831,30.962 120.604,30.962 123.566,28 138.7,28 139.848,26.852 U6.J4_43@139.848,25.318
NetU6_J4_44: U6.J4_44 U7.3 | length 90.6
  Top Layer w0.2: U7.3@58.224,34.727 59.12,33.831 111.635,33.831 115.443,30.023 120.215,30.023 126.581,23.658 126.581,22.285 127.885,20.981 137.015,20.981 139.448,23.414 U6.J4_44@139.448,25.318
NetU6_J4_45: U6.J4_45 U7.4 | length 89.3
  Top Layer w0.2: U7.4@58.683,35.186 59.52,34.35 111.85,34.35 115.658,30.542 120.431,30.542 127.1,23.873 127.1,22.5 128.1,21.5 136.8,21.5 139.048,23.748 U6.J4_45@139.048,25.318
NetU6_J4_48: U6.J4_48 U7.8 | length 82.8
  Top Layer w0.2: U7.8@60.522,37.025 61.42,36.127 112.586,36.127 116.394,32.319 121.167,32.319 123.686,29.8 v1(126.3,29.8) ; v1(129.8,27) 137.2,27 137.848,26.352 U6.J4_48@137.848,25.318
  Bottom Layer w0.2: v1(126.3,29.8) 127,29.8 v1(129.8,27)
NetU6_J4_66: U6.J4_66
NetU10_6: U10.6
NetU10_7: U10.7
NetU10_8: U10.8
NetU10_9: U10.9
NetU10_24: U10.24
NetU10_25: U10.25
NetU10_26: U10.26
NetU10_27: U10.27
NetU10_29: U10.29
NetU10_30: U10.30
NetU10_33: U10.33
NetU10_35: U10.35
NetU10_36: U10.36
NetU10_37: U10.37
NetU10_38: U10.38
NetU10_39: U10.39
NetU10_40: U10.40
NetU10_44: U10.44
NetU10_45: U10.45
NetU10_46: U10.46
NetU10_47: U10.47
NetU10_48: U10.48
NetU10_49: U10.49
NetU10_50: U10.50
NetU10_52: U10.52
NetU10_53: U10.53
NetU10_56: U10.56
NetU10_58: U10.58
NetU10_59: U10.59
NetU10_64: U10.64
NetU10_67: U10.67
NetU10_68: U10.68
NetU10_69: U10.69
NetU10_70: U10.70
NetU10_73: U10.73
NetU10_76: U10.76
NetU10_77: U10.77
NetU10_78: U10.78
NetU10_79: U10.79
NetU10_80: U10.80
NetU10_81: U10.81
NetU10_82: U10.82
NetU10_85: U10.85
NetU10_86: U10.86
NetU10_87: U10.87
NetU10_88: U10.88
NetU10_89: U10.89
NetU10_90: U10.90
NetU10_91: U10.91
NetU10_92: U10.92
NetU10_93: U10.93
NetU10_94: U10.94
NetU10_95: U10.95
P\F\O\: 5V.0@44.196,40.64 R21.1 U10.57 U19.8 | length 45.6
  Top Layer w0.2: U10.57@38.952,38.576 38.952,40.352 39.24,40.64 5V.0@44.196,40.64 ; U19.8@67.116,58.748 67.116,59.616 v1(67.8,60.3)
  Bottom Layer w0.2: R21.1@44.196,38.1 5V.0@44.196,40.64 48.9,45.344 48.9,49.4 50.7,51.2 53.7,51.2 61.3,58.8 66.3,58.8 v1(67.8,60.3)
POWERON: U6.J1_65
PROG: R22.2 R34.1 R35.1 U19.3 | length 32.8
  Top Layer w0.3: U19.3@65.816,53.848 65.816,52.384 v1(65.9,52.3)
  Bottom Layer w0.2: R22.2@50.8,36.449 50.8,44.4 50.2,45 50.2,49.366 51.534,50.7 57.76,50.7 59.41,52.35 62.23,52.35 R35.1@63.316,53.436
  Bottom Layer w0.3: R35.1@63.376,53.496 R34.1@65.168,53.496 65.9,52.764 v1(65.9,52.3)
R\E\S\E\T\: U6.J4_36
R\S\T\O\U\T: R4.1 R5.2 U6.J1_3 | length 11.6
  Top Layer w0.2: v1(139,65.8) 140.7,65.8 141.848,64.652 U6.J1_3@141.848,63.618
  Bottom Layer w0.2: R4.1@134.698,60.937 R5.2@134.698,62.588 137.91,65.8 v1(139,65.8)
RESET_OMAP: C9.1 OMAPRESET.1 OMAPRESET.2 R8.1 U6.J1_1 | length 49.6
  Top Layer w0.2: v1(121.2,33.4) 121.132,33.4 OMAPRESET.2@119.253,35.279 125.148,41.174 C9.1@125.148,44.136 125.484,43.8 v1(127.2,43.8) ; v1(132.6,43.8) 132.6,48.8 142.648,58.848 U6.J1_1@142.648,63.618
  Bottom Layer w0.2: R8.1@117.856,31.9 119.356,33.4 v1(121.2,33.4) ; v1(127.2,43.8) v1(132.6,43.8)
RTCK: J4.11 R17.2 U10.100 | length 13.4
  Top Layer w0.2: J4.11@22.496,28.364 24,26.86 24,25.9 25.324,24.576 U10.100@27.952,24.576
  Bottom Layer w0.3: R17.2@17.416,26.713 17.803,27.1 21.232,27.1 J4.11@22.496,28.364
RTCX1: C15.1 U10.16 Y1.2 | length 4.4
  Top Layer w0.2: Y1.2@37.408,20.364 37.408,22.532 U10.16@37.452,22.576
  Bottom Layer w0.2: C15.1@37.076,18.332 37.076,20.032 Y1.2@37.408,20.364
RTCX2: C16.1 U10.18 Y1.1 | length 4.7
  Top Layer w0.2: U10.18@38.452,22.576 38.452,21.02 Y1.1@39.108,20.364
  Bottom Layer w0.2: Y1.1@39.108,20.364 39.616,19.856 C16.1@39.616,18.332
SEPICINPUT: 5V_ISNS.0 C42.1 C43.1 D2.A D9.A K1.1 R1.2 R26.1 U4.4 | length 80.1
  Top Layer w0.5: D2.A@84.583,62.444 87.376,65.237 R26.1@87.376,66.548 ; 88.948,66.548 v1(90.8,68.4) ; v1(120.534,75.566) U4.4@120.534,76.894
  Top Layer w2: R1.2@81.28,77.216 83.312,75.184 5V_ISNS.0@83.312,69.596 ; D9.A@86.515,72.136 85.852,72.136 5V_ISNS.0@83.312,69.596 ; 93.599,66.895 C42.1@96.81,66.895 ; K1.1@96.26,60.068 96.26,63.54 93.252,66.548 88.948,66.548 R26.1@87.376,66.548 87.376,68.424 86.204,69.596 5V_ISNS.0@83.312,69.596 ; 96.507,63.787 C43.1@98.758,63.787
  Bottom Layer w0.5: v1(90.8,68.4) 92.3,69.9 114.868,69.9 v1(120.534,75.566)
SHD: J8.6 R45.1 SHD.0 U20.0 U23.1 U24.1 | length 38.4
  Top Layer w0.2: 131.628,1.064 U20.0@134.02,1.064 J8.6@141.293,1.064 ; U23.1@131.628,8.896 135.075,8.896 J8.6@137.068,10.889 J8.6@141.318,10.889 ; J8.6@141.318,1.039 143.2,2.921 143.2,9.007 J8.6@141.318,10.889 ; SHD.0@142.24,17.272 R45.1@142.24,14.224 142.24,11.811 J8.6@141.318,10.889
SRST: C47.1 J4.15 LPCRESET.1 LPCRESET.2 Q1.3 R2.1 R11.1 RESET.0 U1.1 U10.17 | length 61.1
  Top Layer w0.2: J4.15@22.496,33.444 R11.1@24.528,33.444 ; RESET.0@34.544,18.796 32.195,16.447 LPCRESET.2@32.195,7.964 33.559,6.6 38.175,6.6 Q1.3@38.58,7.005 ; U10.17@37.952,22.576 37.952,23.852 38.3,24.2 v1(38.3,24.6)
  Bottom Layer w0.2: J4.15@22.496,33.444 22.496,32.389 24.4,30.485 24.4,28.3 24.6,28.1 26.766,28.1 27.5,27.366 27.5,24.6 28.7,23.4 29.6,23.4 35.396,17.604 C47.1@35.396,14.896 ; U1.1@33.28,12.68 34.804,12.68 R2.1@35.312,12.172 C47.1@35.312,14.484 ; RESET.0@34.47,18.87 36.9,21.3 37.616,21.3 38.308,21.992 38.308,24.592 v1(38.3,24.6)
TCK: J4.9 R16.2 U10.5 | length 17.7
  Top Layer w0.2: J4.9@22.496,25.824 24.32,24 31.7,24 31.952,23.748 U10.5@31.952,22.576
  Bottom Layer w0.3: R16.2@17.416,23.157 18.859,24.6 21.272,24.6 J4.9@22.496,25.824
TDI: J4.5 R14.1 U10.2 | length 19.1
  Top Layer w0.2: J4.5@22.496,20.744 21.3,21.94 21.3,23.9 21.734,24.334 23.266,24.334 23.7,23.9 23.7,22.7 25.6,20.8 30.2,20.8 30.452,21.052 U10.2@30.452,22.576
  Bottom Layer w0.3: J4.5@22.58,20.828 R14.1@24.892,20.828
TDO: J4.13 R12.1 U10.1 | length 15.2
  Top Layer w0.2: J4.13@22.496,30.904 R12.1@24.444,30.904 ; v1(28.9,22.6) 28.9,22.596 28.92,22.576 U10.1@29.952,22.576
  Bottom Layer w0.2: J4.13@22.496,30.904 24,29.4 24,28.134 24.434,27.7 26.6,27.7 27.1,27.2 27.1,24.434 28.9,22.634 v1(28.9,22.6)
TMS: J4.7 R13.1 U10.3 | length 14.4
  Top Layer w0.2: J4.7@22.912,23.7 J4.7@22.496,23.284 25.38,20.4 30.366,20.4 30.952,20.986 U10.3@30.952,22.576
  Bottom Layer w0.3: J4.7@22.58,23.368 R13.1@24.892,23.368
TRST: J4.3 R15.1 U10.4 | length 14.1
  Top Layer w0.2: J4.3@22.496,18.204 24.292,20 30.6,20 31.452,20.852 U10.4@31.452,22.576
  Bottom Layer w0.3: J4.3@22.58,18.288 R15.1@24.892,18.288
UART1_RXD: U10.98 U25.39 UART1_RX.0 | length 102.3
  Top Layer w0.2: v1(26,26.7) 26,26.596 27.02,25.576 U10.98@27.952,25.576 ; UART1_RX.0@88.9,20.32 90.12,19.1 95.4,19.1 97.005,20.705 97.751,20.705 U25.39@98.316,20.14
  Bottom Layer w0.2: v1(26,26.7) 26,24.1 27.417,22.683 27.417,19.383 27.417,6.683 28.9,5.2 45.434,5.2 57.134,16.9 85.48,16.9 UART1_RX.0@88.9,20.32
UART1_TXD: U22.2 U25.38 | length 3.5
  Top Layer w0.2: U22.2@96.144,22.955 U25.38@98.604,20.494
UART2_RXD: U25.17 U26.12 | length 5.5
  Top Layer w0.2: U25.17@108.994,16.958 110.452,15.5 112.128,15.5 U26.12@113.398,16.769
UART2_TXD: U25.16 U26.13 | length 5.9
  Top Layer w0.2: U25.16@108.994,13.706 111.253,13.706 U26.13@113.857,16.309
USB_OTG_DM: U6.J1_37
USB_OTG_DP: U6.J1_36
USB_OTG_ID: U6.J1_46
USB_OTG_VBUS: U6.J1_54
USBLED1: D13.K U25.28 U25.29 | length 4.4
  Top Layer w0.2: U25.28@105.105,20.847 U25.29@104.751,21.201 106.755,23.205 D13.K@106.755,24.258
USBLED2: D10.K U25.54 U25.55 | length 6.9
  Top Layer w0.2: D10.K@91.084,12.304 92.015,11.373 96.337,11.373 U25.54@96.902,11.938 U25.55@97.256,11.584
VBATT: J5.1 U6.J1_52 U10.19 | length 151.5
  Top Layer w0.2: U10.19@38.952,22.576 38.952,23.783 39.945,24.776 42.255,24.776 43.231,23.8 45.2,23.8 v1(47.4,26) ; v1(50.1,26.5) 50.237,26.637 52.226,26.637 J5.1@56.008,22.855 J5.1@56.008,12.705 59.113,9.6 65.003,9.6 75.2,19.797 75.2,26.9 75.2,27.563 76.137,28.5 78.3,28.5 v1(79.9,30.1) ; v1(135.4,70.8) 135.448,70.752 U6.J1_52@135.448,68.618
  Bottom Layer w0.2: v1(47.4,26) 48.1,26.7 49.9,26.7 v1(50.1,26.5) ; v1(79.9,30.1) 81.417,28.583 82.951,28.583 90.053,35.684 109.422,35.684 132.1,58.363 132.1,67.5 v1(135.4,70.8)
VBUS: C60.1 C61.1 L1.2 R47.2 U21.1 U21.3 | length 20.2
  Top Layer w0.2: U21.1@114.932,2.312 114.811,2.312 114.182,2.941 114.182,4.018 114.386,4.222 U21.3@114.932,4.222 v1(116.678,4.222) 117.594,4.222 C61.1@118.588,3.228 ; C61.1@118.394,3.422 C61.1@118.588,3.228 ; L1.2@120.747,4.752 120.747,3.399 C60.1@120.552,3.204 118.612,3.204 C61.1@118.588,3.228
  Bottom Layer w0.2: R47.2@109.127,8.527 113.431,4.222 v1(116.678,4.222)
VMID: C55.2 C58.1 U19.10 | length 28.7
  Top Layer w0.3: v1(65.6,60.2) 65.816,59.984 U19.10@65.816,58.748 ; v1(70.9,64.4) 77.1,64.4 77.7,63.8 77.7,59.412 C58.1@75.692,57.404 C58.1@75.184,56.896
  Top Layer w2: C55.2@75.184,51.736 C58.1@75.184,56.896
  Bottom Layer w0.3: v1(65.6,60.2) 65.8,60.2 70,64.4 v1(70.9,64.4)
VSUPERCAP: C55.1 D5.A R24.1 R32.1 U19.1 U19.2 VSUPERCAP.0 | length 50.3
  Top Layer w0.3: 64.406,52 65.606,50.8 R32.1@66.548,50.8 ; U19.1@64.516,53.848 U19.2@65.166,53.848
  Top Layer w1.5: 64.406,49.094 64.406,52 U19.1@64.406,53.738
  Top Layer w2: VSUPERCAP.0@60.452,47.752 D5.A@60.452,50.292 ; D5.A@60.96,50.8 62.7,50.8 64.406,49.094 66.764,46.736 C55.1@75.184,46.736
  Bottom Layer w0.2: R24.1@53.028,37.32 53.028,42.972 50.6,45.4 50.6,49.2 51.7,50.3 60.46,50.3 D5.A@60.96,50.8
WIFI_POWER: U6.J4_39
XTAL1: C17.1 U10.22 Y2.1 | length 8
  Top Layer w0.2: U10.22@40.452,22.576 40.452,19.999 Y2.1@42.664,17.787
  Bottom Layer w0.2: Y2.1@42.664,17.787 C17.1@44.977,17.787
XTAL2: C20.1 U10.23 Y2.2 | length 14.2
  Top Layer w0.2: U10.23@40.952,22.576 40.952,21.548 44.3,18.2 44.3,14.543 Y2.2@42.664,12.907
  Bottom Layer w0.2: Y2.2@42.664,12.907 43.009,13.252 C20.1@45.014,13.252
pads on no net: H1.1 H2.1 H3.1 J8.2@144.12,5.964 J8.4 U2.5 U2.8 U5.3 U5.6 U6.0 U6.J1_2 U6.J1_4 U6.J1_6 U6.J1_7 U6.J1_8 U6.J1_10 U6.J1_11 U6.J1_12 U6.J1_13 U6.J1_14 U6.J1_15 U6.J1_17 U6.J1_18 U6.J1_19 U6.J1_20 U6.J1_22 U6.J1_23 U6.J1_24 U6.J1_25 U6.J1_27 U6.J1_28 U6.J1_29 U6.J1_30 U6.J1_32 U6.J1_33 U6.J1_34 U6.J1_35 U6.J1_38 U6.J1_39 U6.J1_41 U6.J1_42 U6.J1_43 U6.J1_44 U6.J1_45 U6.J1_47 U6.J1_49 U6.J1_51 U6.J1_53 U6.J1_55 U6.J1_57 U6.J1_60 U6.J1_61 U6.J1_62 U6.J1_63 U6.J1_64 U6.J1_68 U6.J1_69 U6.J4_4 U6.J4_5 U6.J4_9 U6.J4_10 U6.J4_11 U6.J4_12 U6.J4_13 U6.J4_14 U6.J4_16 U6.J4_18 U6.J4_20 U6.J4_22 U6.J4_23 U6.J4_25 U6.J4_26 U6.J4_28 U6.J4_29 U6.J4_30 U6.J4_31 U6.J4_32 U6.J4_34 U6.J4_35 U6.J4_37 U6.J4_38 U6.J4_40 U6.J4_42 U6.J4_46 U6.J4_47 U6.J4_50 U6.J4_52 U6.J4_54 U6.J4_55 U6.J4_57 U6.J4_58 U6.J4_59 U6.J4_60 U6.J4_61 U6.J4_62 U6.J4_63 U6.J4_64 U6.J4_65 U6.J4_67 U6.J4_68 U6.J4_69 U6.J4_70 U7.1 U7.20 U10.13 U11.4 U11.6 U25.18 U25.19 U25.21 U25.22 U25.23 U25.24 U25.26 U25.27 U25.30 U25.32 U25.33 U25.34 U25.36 U25.40 U25.41 U25.43 U25.44 U25.45 U25.46 U25.48 U25.52 U25.53 U25.57 U25.58 U25.59 U25.60 U27.7
copper on no net: | length 152
  Bottom Layer w0.2: 81.5,57.3 81.5,41.4 83.2,39.7 107.3,39.7 123.3,55.7 123.3,78.8 122.2,79.9 80.8,79.9 79.3,78.4 79.3,73.3 81.5,71.1 81.5,60.5

## Polygon pours and split planes (outlines as drawn)
GND on Bottom Layer "POLYGND" (solid, remove dead copper): 27.7,49.8 13.8,35.9 13.8,23.3 8.6,18.1 1.5,18.1 1,17.6 1,2 1.9,1.1 63.2,1.1 65.4,3.3 65.4,7.2 69.2,11 76.3,11 79.2,8.1 79.2,2.7 81.2,0.7 142.6,0.7 144,2.1 144,78.5 142.4,80.1 80.6,80.1 79,78.5 79,72.7 75.8,69.5 69.2,69.5 64.4,74.3 64.4,78.8 63.6,79.6 57.2,79.6 55.4,77.8 55.4,55.4 55.4,53.4 51.8,49.8

## Other copper
Top Layer:
  rectangle net NetC41_1: 93.9,48 100.3,55.1
  rectangle net NetC41_2: 101.3,46.9 106.3,55.1
  rectangle net GND: 91.2,40.6 97.3,46
Bottom Layer:
  rectangle net GND: 91,40.6 97.3,46

## Silkscreen, mask and mechanical layers (free items; w line width, h text height)
Top Overlay:
  drawing of 694 lines, arcs and shapes, not listed
  text "SION" at 95.1,35.3 h6
  text "Sunswift IVy Observer Node - Revision 2" at 58.7,31.8 h1.2
  text "Irving Suryajaya Tjiptowarsono" at 58.4,1.2 h1.2 r45
Bottom Overlay:
  region: 137 vertices and 55 holes, not listed, extent 63.41,15.094 75.602,25.457
  lines w5: 99.48,48.335 ccw(c104.48,48.335) 99.482,48.469
  text "NICTA" at 113.7,34.1 h8
  text "keg" at 67.284,12.386 h3
Mechanical 1:
  the board outline again, w0.254
Mechanical 16:
  lines w0.127: -61.9,9.46 -56.82,9.46 ; -61.9,57.72 -56.82,57.72 ; -61.9,105.98 -56.82,105.98 ; 11.125,-38.8 11.125,-33.72 ; 11.125,149.16 11.125,154.24 ; 84.15,-38.8 84.15,-33.72 ; 84.15,149.16 84.15,154.24 ; 110.82,-26.1 225.12,-26.1 ; 110.82,-18.48 225.12,-18.48 ; 110.82,-10.86 148.92,-10.86 ; 148.92,-33.72 148.92,-18.48 148.92,-3.24 ; 157.175,-38.8 157.175,-33.72 ; 157.175,149.16 157.175,154.24 ; 202.26,-33.72 202.26,-18.48 ; 225.12,9.46 230.2,9.46 ; 110.82,-33.72 75.26,-33.72 75.26,-3.24 110.82,-3.24 ; 110.82,-33.72 225.12,-33.72 ; 110.82,-33.72 110.82,-3.24 ; 110.82,-3.24 148.92,-3.24 ; 148.92,-3.24 225.12,-3.24 225.12,-33.72 ; 225.12,-33.72 -56.82,-33.72 -56.82,149.16 225.12,149.16 225.12,-33.72 ; -61.9,-38.8 230.2,-38.8 230.2,154.24 -61.9,154.24 -61.9,-38.8
  text "4" at 197.3,151.2 h1.78
  text "1" at -25.654,150.811 h1.78
  text "2" at 46.99,150.811 h1.78
  text "3" at 120.142,150.811 h1.78
  text "A" at -59.995,127.799 h1.78
  text "B" at -59.995,79.742 h1.78
  text "C" at -59.995,31.228 h1.78
  text "C" at 227.025,31.228 h1.78
  text "ENGINEER:" at 112.09,-5.78 h1.14
  text "TITLE:" at 150.19,-5.78 h1.14
  text "Irving S Tjiptowarsono" at 113.995,-9.082 h1.78
  text "SION - R2" at 159.207,-12.765 h5.08
  text "PCB DESIGNER:" at 112.09,-13.273 h1.14
  text "Sunswift" at 78.054,-13.654 h5.08
  text "Irving S Tjiptowarsono" at 113.995,-16.575 h1.78
  text "D" at -59.995,-16.778 h1.78
  text "D" at 227.025,-16.778 h1.78
  text "DATE:" at 112.09,-21.02 h1.14
  text "PART NO.:" at 150.19,-21.02 h1.14
  text "REV:" at 203.53,-21.02 h1.14
  text "Room 342" at 79.07,-23.56 h1.78
  text "Number" at 159.969,-23.941 h1.78
  text ".PRINT_DATE" at 113.36,-24.068 h1.78
  text "Rev" at 207.848,-24.195 h1.78
  text "EE Building" at 79.07,-26.1 h1.78
  text "UNSW, Sydney Australia" at 79.07,-28.64 h1.78
  text "FILE NAME:" at 112.09,-28.64 h1.14
  text "DWG NO:" at 150.19,-28.64 h1.14
  text "SCALE:" at 203.53,-28.64 h1.14
  text "2052" at 79.07,-31.18 h1.78
  text "Number" at 160.604,-31.18 h1.78
  text "Scale" at 208.991,-31.307 h1.78
  text ".PCB_FILE_NAME_NO_PATH" at 113.36,-31.688 h1.78
  text "1" at -25.654,-37.149 h1.78
  text "2" at 46.99,-37.149 h1.78
  text "3" at 120.142,-37.149 h1.78
  text "4" at 193.04,-37.149 h1.78

## Text inside footprints (layer, text, board x,y; h text height)
C55: Top Overlay "+" at 79.5,43.2 h1.52 r90
C58: Top Overlay "+" at 79.5,54 h1.52 r90
ID1: Bottom Overlay "ID" at 116.74,73.294 h1.52
J1: Top Overlay "131-040" at 9.649,48.358 h0.76 r90
J2: Top Overlay "131-040" at 9.649,31.086 h0.76 r90
J4: Top Overlay "2" at 20.464,13.124 h1.27 r90; Top Overlay "1" at 23.004,13.124 h1.27 r90; Top Overlay "19" at 23.004,40.048 h1.27 r90; Top Overlay "20" at 20.464,40.048 h1.27 r90
J5: Top Overlay "+" at 54.508,26.38 h3 r270; Top Overlay "+" at 54.508,11.18 h3 r270; Top Overlay "-" at 49.308,15.78 h3 r270
U6: Top Overlay "J1" at 131.198,70.868 h1.52 r90; Top Overlay "J4" at 131.298,32.318 h1.52 r90; Top Overlay "Overo Motherboard" at 138.748,34.918 h1.52 r90; Top Overlay "Gumstix" at 136.098,41.868 h1.52 r90
U11: Top Overlay "SHIELD" at 42.512,54.42 h1; Top Overlay "SHIELD" at 26.612,76.42 h1; Top Overlay "TDK-Lambda CC10-F-E" at 27.112,68.12 h1; Top Overlay "Isolated 10W DC-DC Converter" at 24.212,65.62 h1; Top Overlay "+VIN" at 21.512,73.12 h1; Top Overlay "RC" at 21.512,63.12 h1; Top Overlay "-VIN" at 21.612,58.02 h1; Top Overlay "NC" at 52.012,57.92 h1; Top Overlay "-VOUT" at 49.012,62.92 h1; Top Overlay "TRM" at 50.912,68.12 h1; Top Overlay "+VOUT" at 49.012,73.12 h1